# Altium PCB BNC_RJ45_8x.PcbDoc
Units mm, origin at the board's own origin, x right, y up, seen from the top; angles counter-clockwise.
Board outline 110 x 88.1 mm, 2 copper layers (Top Layer, Bottom Layer); 51 components, 42 nets, 140 pads, 9 vias.
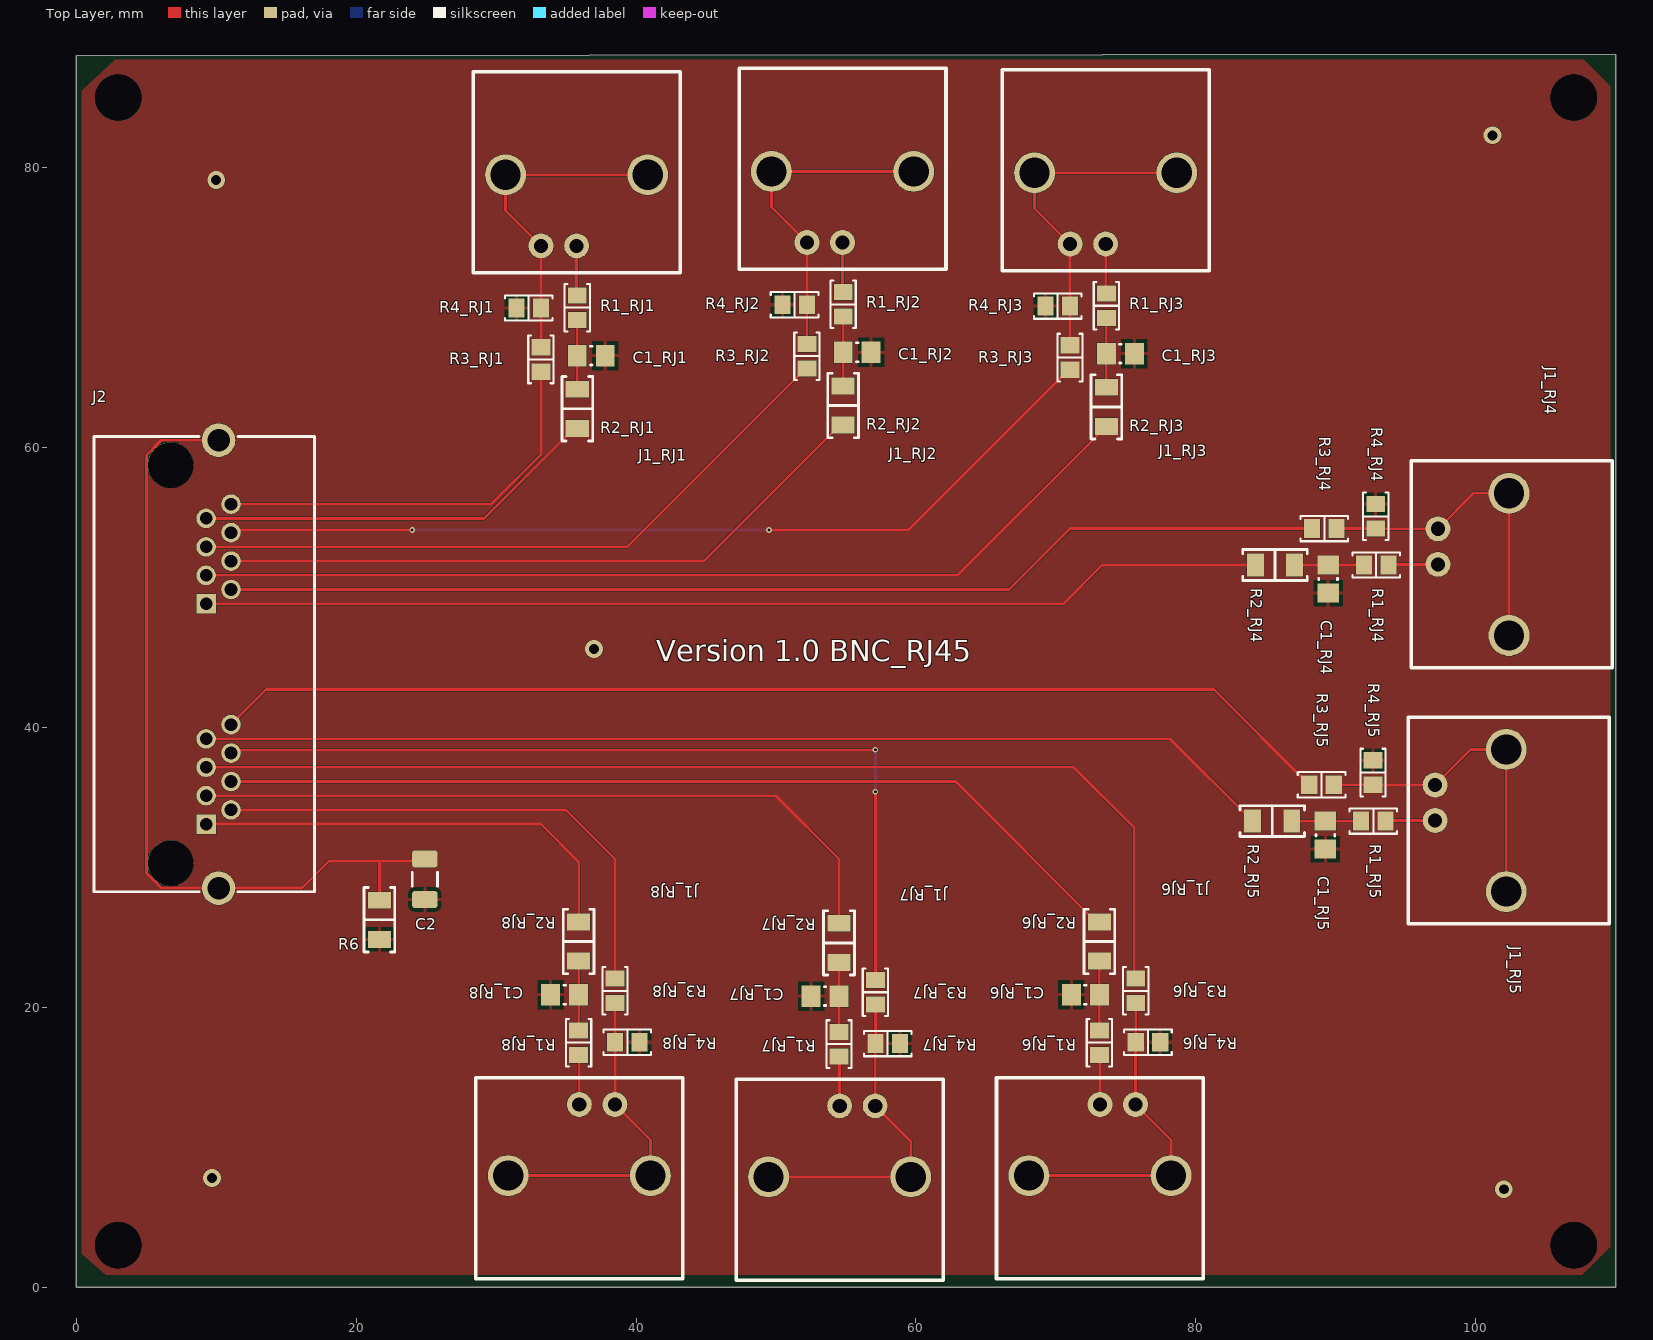
[diagram p0: Top Layer view]
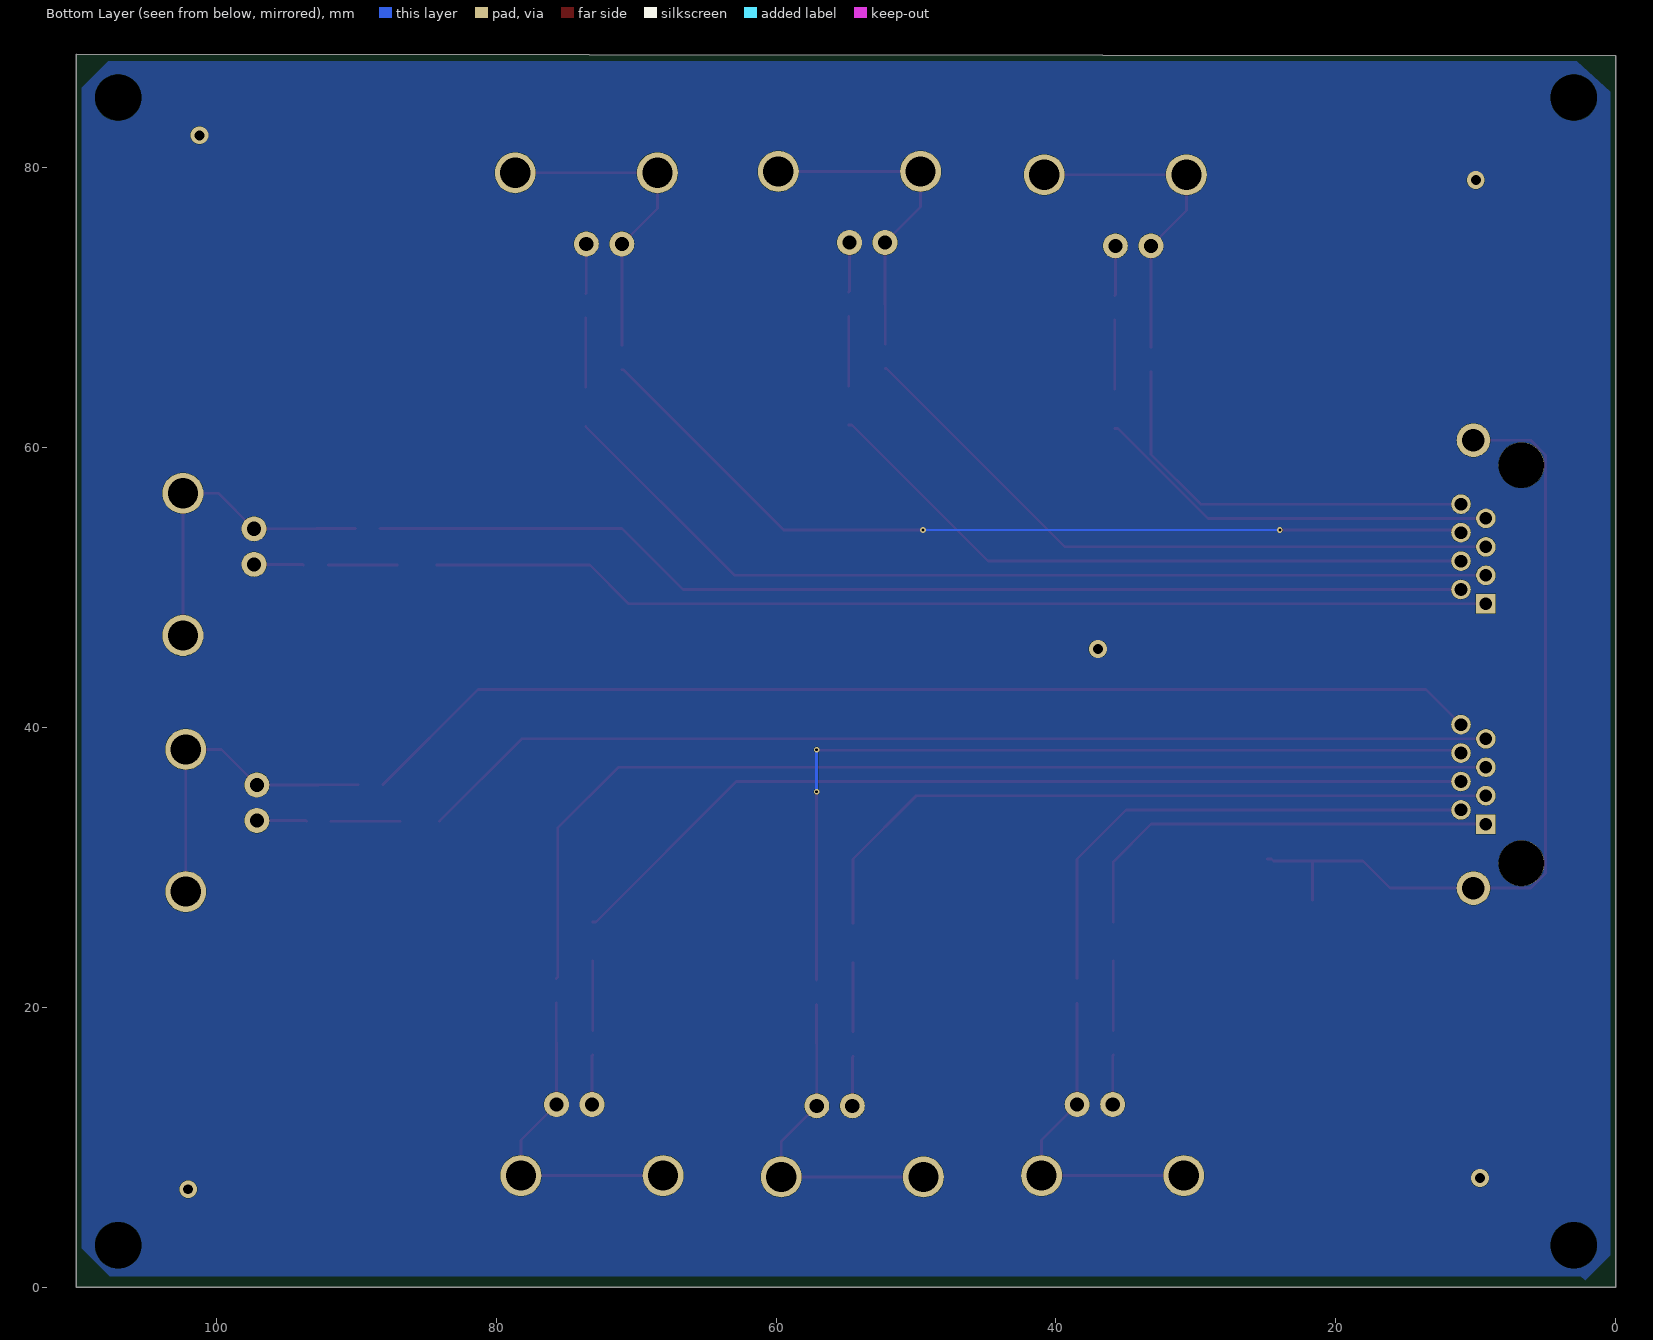
[diagram p1: Bottom Layer view, seen from below]
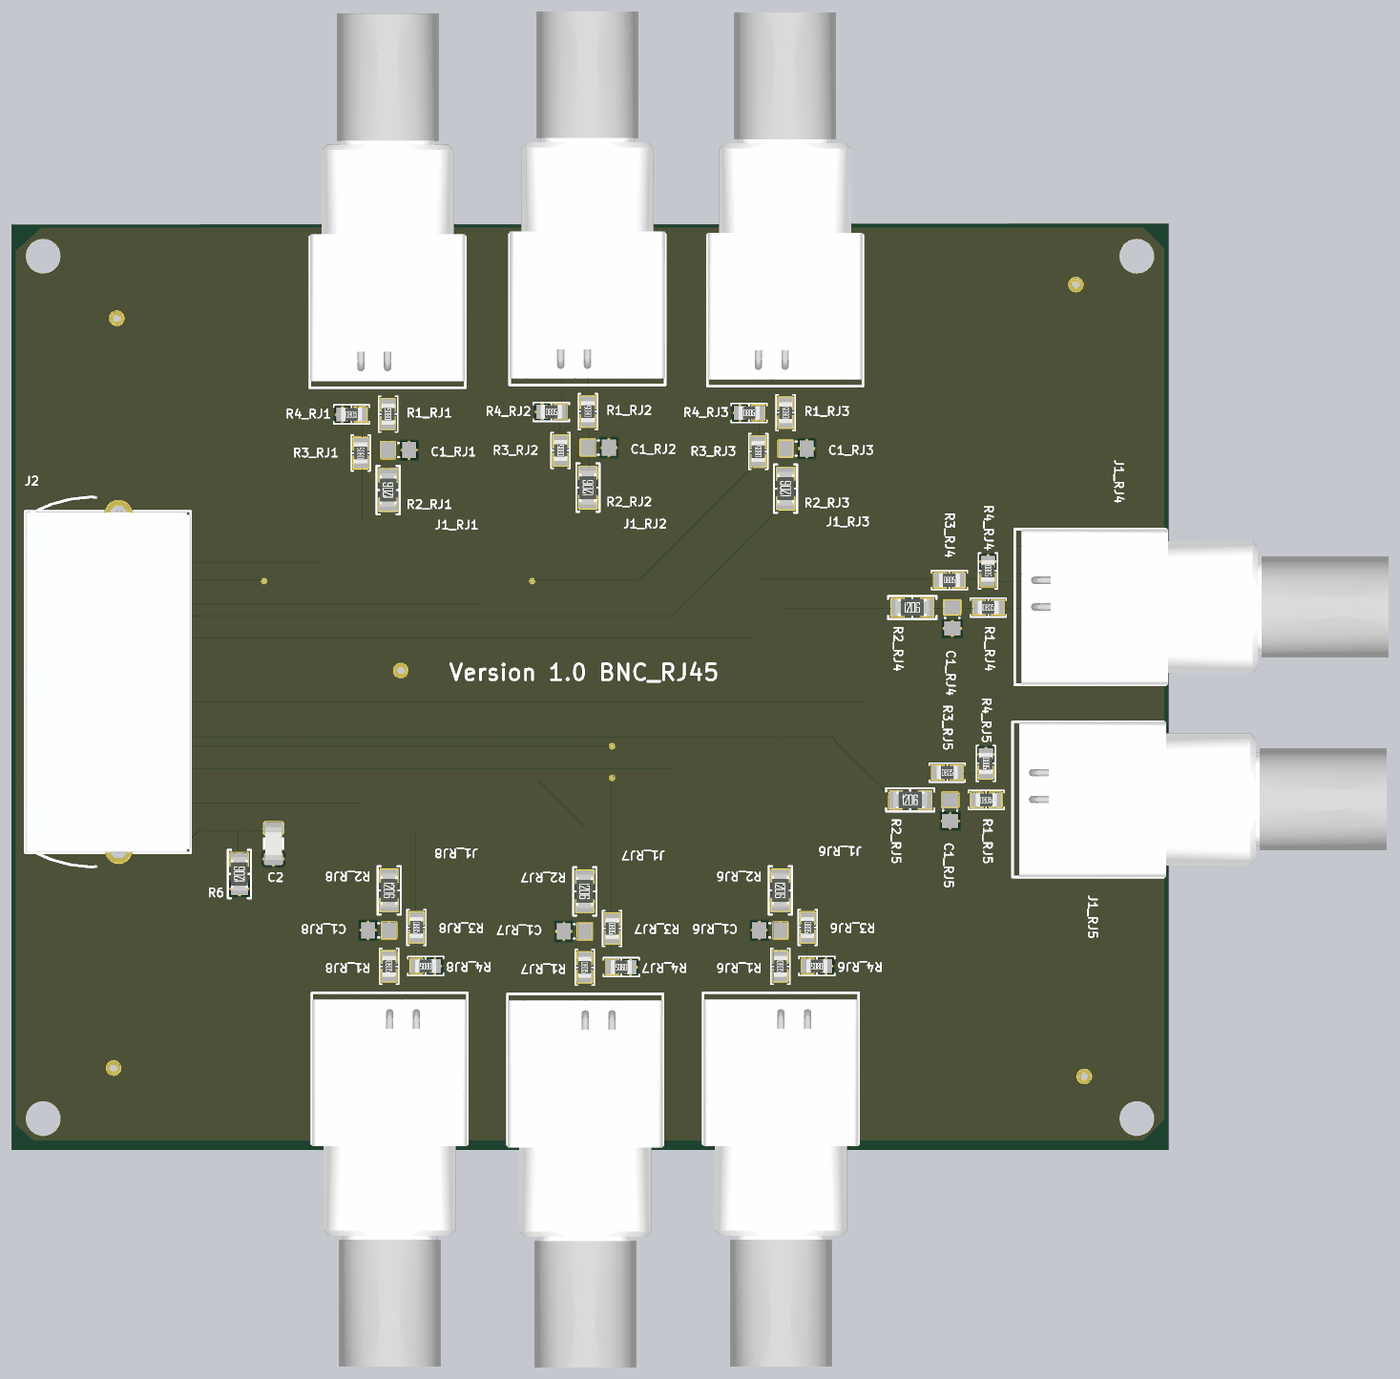
[diagram p2: 3D render of the assembled board from above, using the file's embedded part models]

## Layer stack, top to bottom
Top Solder: solder mask 0.0102, Solder Resist, Dk 3.5
Top Layer: signal copper 0.0356
Dielectric 1: dielectric 0.32, FR-4, Dk 4.8
Bottom Layer: signal copper 0.0356
Bottom Solder: solder mask 0.0102, Solder Resist, Dk 3.5

## Board outline
0,88 0,0 110,0 110,88.097

## Design rules (kind name [scope] priority, off if disabled: settings)
Clearance [All] p1: gap=0.005 ignorepadtopadclearanceinfootprint=FALSE except(0.003: Arc-Arc Arc-Track Track-Track; 0.006: Arc-Via Arc-Text Arc-Hole Track-Via Track-Text Track-Hole SMDPad-Via SMDPad-Text SMDPad-Hole THPad-Via THPad-Text THPad-Hole Via-Via Via-Text Via-Hole Fill-Text Fill-Hole Poly-Text Poly-Hole Region-Text Region-Hole Text-Text Text-Hole)
PolygonConnect [All] p1: connectstyle=Relief reliefconductorwidth=0.254 reliefentries=4 polygonreliefangle="90 Angle" airgapwidth=0.254
RoomDefinition RJ5 [InComponentClass('RJ5')] p1: confinementstyle=ConfineIn formatcopy=TRUE lockcomponents=FALSE outline 82.75,41.9 82.75,25 130.888,25 130.888,41.9
RoomDefinition Top_sheet [InComponentClass('Top_sheet')] p2: confinementstyle=ConfineIn formatcopy=TRUE lockcomponents=FALSE outline 26.302,62.805 0.775,62.805 0.775,23.689 26.302,23.689
RoomDefinition RJ1 [InComponentClass('RJ1')] p3: confinementstyle=ConfineIn formatcopy=TRUE lockcomponents=FALSE outline 27.2,60.062 44.1,60.062 44.1,108.2 27.2,108.2
RoomDefinition RJ3 [InComponentClass('RJ3')] p4: confinementstyle=ConfineIn formatcopy=TRUE lockcomponents=FALSE outline 65,60.2 81.9,60.2 81.9,108.338 65,108.338
RoomDefinition RJ4 [InComponentClass('RJ4')] p5: confinementstyle=ConfineIn formatcopy=TRUE lockcomponents=FALSE outline 82.95,60.2 82.95,43.3 131.088,43.3 131.088,60.2
RoomDefinition RJ2 [InComponentClass('RJ2')] p6: confinementstyle=ConfineIn formatcopy=TRUE lockcomponents=FALSE outline 46.2,60.3 63.1,60.3 63.1,108.438 46.2,108.438
RoomDefinition RJ8 [InComponentClass('RJ8')] p7: confinementstyle=ConfineIn formatcopy=TRUE lockcomponents=FALSE outline 44.5,27.4 27.6,27.4 27.6,-20.738 44.5,-20.738
RoomDefinition RJ7 [InComponentClass('RJ7')] p8: confinementstyle=ConfineIn formatcopy=TRUE lockcomponents=FALSE outline 63.1,27.3 46.2,27.3 46.2,-20.838 63.1,-20.838
RoomDefinition RJ6 [InComponentClass('RJ6')] p9: confinementstyle=ConfineIn formatcopy=TRUE lockcomponents=FALSE outline 81.7,27.4 64.8,27.4 64.8,-20.738 81.7,-20.738
RoutingVias [All] p1: holewidth=0.2 width=0.4 viastyle="Through Hole" minholewidth=0.2 minwidth=0.4 maxholewidth=3.4 maxwidth=3.4
SolderMaskExpansion [All] p1: expansion=0.102 istentingtop=FALSE
Width [All] p1: maxlimit=0.5 minlimit=0.2 preferedwidth=0.254
30 further rules are at their usual default settings.

## Classes and differential pairs
channel class schematic_rj45bnc: RJ1 RJ2 RJ3 RJ4 RJ5 RJ6 RJ7 RJ8
net class Signal_P[1..8]: Signal_P1 Signal_P2 Signal_P3 Signal_P4 Signal_P5 Signal_P6 Signal_P7 Signal_P8
net class Signal_N[1..8]: Signal_N1 Signal_N2 Signal_N3 Signal_N4 Signal_N5 Signal_N6 Signal_N7 Signal_N8
component class Top_sheet: C2 J2 R6
component class RJ8: C1_RJ8 J1_RJ8 R1_RJ8 R2_RJ8 R3_RJ8 R4_RJ8
component class RJ7: C1_RJ7 J1_RJ7 R1_RJ7 R2_RJ7 R3_RJ7 R4_RJ7
component class RJ6: C1_RJ6 J1_RJ6 R1_RJ6 R2_RJ6 R3_RJ6 R4_RJ6
component class RJ5: C1_RJ5 J1_RJ5 R1_RJ5 R2_RJ5 R3_RJ5 R4_RJ5
component class RJ4: C1_RJ4 J1_RJ4 R1_RJ4 R2_RJ4 R3_RJ4 R4_RJ4
component class RJ3: C1_RJ3 J1_RJ3 R1_RJ3 R2_RJ3 R3_RJ3 R4_RJ3
component class RJ2: C1_RJ2 J1_RJ2 R1_RJ2 R2_RJ2 R3_RJ2 R4_RJ2
component class RJ1: C1_RJ1 J1_RJ1 R1_RJ1 R2_RJ1 R3_RJ1 R4_RJ1

## Components (designator, comment, footprint, x,y, rotation, side; value= is the part's Value field where it differs from the comment)
C1_RJ1 "0.01 µF" C_0805 36.8,66.562 r180 top (schematic designator C1)
C1_RJ2 "0.01 µF" C_0805 55.8,66.8 r180 top (schematic designator C1)
C1_RJ3 "0.01 µF" C_0805 74.6,66.7 r180 top (schematic designator C1)
C1_RJ4 "0.01 µF" C_0805 89.45,50.6 r90 top (schematic designator C1)
C1_RJ5 "0.01 µF" C_0805 89.25,32.3 r90 top (schematic designator C1)
C1_RJ6 "0.01 µF" C_0805 72.1,20.9 r0 top (schematic designator C1)
C1_RJ7 "0.01 µF" C_0805 53.5,20.8 r0 top (schematic designator C1)
C1_RJ8 "0.01 µF" C_0805 34.9,20.9 r0 top (schematic designator C1)
C2 "100 pF" C_1206 24.905,29.15 r270 top
J1_RJ1 "1-1478032-0" "Right Angle BNC" 35.754,74.403 r0 top (schematic designator J1)
J1_RJ2 "1-1478032-0" "Right Angle BNC" 54.754,74.641 r0 top (schematic designator J1)
J1_RJ3 "1-1478032-0" "Right Angle BNC" 73.554,74.541 r0 top (schematic designator J1)
J1_RJ4 "1-1478032-0" "Right Angle BNC" 97.291,51.646 r270 top (schematic designator J1)
J1_RJ5 "1-1478032-0" "Right Angle BNC" 97.091,33.346 r270 top (schematic designator J1)
J1_RJ6 "1-1478032-0" "Right Angle BNC" 73.146,13.059 r180 top (schematic designator J1)
J1_RJ7 "1-1478032-0" "Right Angle BNC" 54.546,12.959 r180 top (schematic designator J1)
J1_RJ8 "1-1478032-0" "Right Angle BNC" 35.946,13.059 r180 top (schematic designator J1)
J2 "RJHSE538002" RJHSE-5380-02 6.744,58.741 r270 top
R1_RJ1 "0R" "RES 0805_2012" 35.8,69.987 r90 top (schematic designator R1)
R1_RJ2 "0R" "RES 0805_2012" 54.8,70.225 r90 top (schematic designator R1)
R1_RJ3 "0R" "RES 0805_2012" 73.6,70.125 r90 top (schematic designator R1)
R1_RJ4 "0R" "RES 0805_2012" 92.875,51.6 r0 top (schematic designator R1)
R1_RJ5 "0R" "RES 0805_2012" 92.675,33.3 r0 top (schematic designator R1)
R1_RJ6 "0R" "RES 0805_2012" 73.1,17.475 r270 top (schematic designator R1)
R1_RJ7 "0R" "RES 0805_2012" 54.5,17.375 r270 top (schematic designator R1)
R1_RJ8 "0R" "RES 0805_2012" 35.9,17.475 r270 top (schematic designator R1)
R2_RJ1 "10k" "RES 1206_3216" 35.8,62.762 r90 top (schematic designator R2)
R2_RJ2 "10k" "RES 1206_3216" 54.8,63 r90 top (schematic designator R2)
R2_RJ3 "10k" "RES 1206_3216" 73.6,62.9 r90 top (schematic designator R2)
R2_RJ4 "10k" "RES 1206_3216" 85.65,51.6 r0 top (schematic designator R2)
R2_RJ5 "10k" "RES 1206_3216" 85.45,33.3 r0 top (schematic designator R2)
R2_RJ6 "10k" "RES 1206_3216" 73.1,24.7 r270 top (schematic designator R2)
R2_RJ7 "10k" "RES 1206_3216" 54.5,24.6 r270 top (schematic designator R2)
R2_RJ8 "10k" "RES 1206_3216" 35.9,24.7 r270 top (schematic designator R2)
R3_RJ1 "0R" "RES 0805_2012" 33.2,66.287 r90 top (schematic designator R3)
R3_RJ2 "0R" "RES 0805_2012" 52.2,66.525 r90 top (schematic designator R3)
R3_RJ3 "0R" "RES 0805_2012" 71,66.425 r90 top (schematic designator R3)
R3_RJ4 "0R" "RES 0805_2012" 89.175,54.2 r0 top (schematic designator R3)
R3_RJ5 "0R" "RES 0805_2012" 88.975,35.9 r0 top (schematic designator R3)
R3_RJ6 "0R" "RES 0805_2012" 75.7,21.175 r270 top (schematic designator R3)
R3_RJ7 "0R" "RES 0805_2012" 57.1,21.075 r270 top (schematic designator R3)
R3_RJ8 "0R" "RES 0805_2012" 38.5,21.175 r270 top (schematic designator R3)
R4_RJ1 "0R" "RES 0805_2012" 32.325,69.958 r0 top (schematic designator R4)
R4_RJ2 "0R" "RES 0805_2012" 51.325,70.196 r0 top (schematic designator R4)
R4_RJ3 "0R" "RES 0805_2012" 70.125,70.096 r0 top (schematic designator R4)
R4_RJ4 "0R" "RES 0805_2012" 92.846,55.075 r270 top (schematic designator R4)
R4_RJ5 "0R" "RES 0805_2012" 92.646,36.775 r270 top (schematic designator R4)
R4_RJ6 "0R" "RES 0805_2012" 76.575,17.504 r180 top (schematic designator R4)
R4_RJ7 "0R" "RES 0805_2012" 57.975,17.404 r180 top (schematic designator R4)
R4_RJ8 "0R" "RES 0805_2012" 39.375,17.504 r180 top (schematic designator R4)
R6 "1M" "RES 1206_3216" 21.662,26.254 r90 top

## Footprints (in the part's own frame and the unit in brackets; to place one, negate y for a bottom-side part, rotate by r counter-clockwise, add the part's x,y. Pads: shape width x height; smd on the part's side, far side on the other; paste and mask are expansions set on the pad)
C_0805 [mm] "Chip Capacitor, Body 2.0x1.2mm, Height 1.45mm, IPC Low Density"
  rect 1.35x1.55 smd: 1(-1,0) 2(1,0)
  silkscreen extent -0.05,-0.67 0.05,0.67, body extent -1.1,-0.72 1.1,0.72, height 1.45
C_1206 [mm]
  rrect33% 1.21x1.82 smd: 1(1.45,0) 2(-1.45,0)
  silkscreen extent -0.5,-0.9 0.5,0.9, body extent -1.6,-0.81 1.6,0.81, height 1.82
"RES 0805_2012" [mm] "Chip Resistor, 2-Leads, Body 2.00x1.25mm, IPC Medium Density"
  rect 1.15x1.35 smd: 1(-0.875,0) 2(0.875,0)
  silkscreen extent -1.7,-0.9 1.7,0.9, body extent -1,-0.62 1,0.63, height 0.6
"RES 1206_3216" [mm] "Chip Resistor, 2-Leads, Body 3.13x1.55mm, IPC Medium Density"
  rect 1.2x1.65 smd: 1(-1.4,0) 2(1.4,0)
  silkscreen extent -2.3,-1.1 2.3,1.1, body extent -1.6,-0.8 1.6,0.8, height 0.6
"Right Angle BNC" [mil]
  round 70 hole 40: 1(0,0) 2(-100,0)
  round 115 hole 85: 3(200,200) 4(-200,200)
  silkscreen extent -291,-75 291,490, body extent -290,-50 291,1325, height 519
RJHSE-5380-02 [mm] "Modular Jack Horizontal Shielded Dual Port 8P8C Tab Up"
  rect 1.4x1.4 hole 0.9: A1(9.906,2.54) B1(25.654,2.54)
  round 1.4 hole 0.9: A2(8.89,4.318) A3(7.874,2.54) A4(6.858,4.318) A5(5.842,2.54) A6(4.826,4.318) A7(3.81,2.54) A8(2.794,4.318) B2(24.638,4.318) B3(23.622,2.54) B4(22.606,4.318) B5(21.59,2.54) B6(20.574,4.318) B7(19.558,2.54) B8(18.542,4.318)
  round 3.25 hole 3.25 unplated: MH1(0,0) MH2(28.448,0)
  round 2.4 hole 1.6: S1(-1.778,3.429) S2(30.226,3.429)
  silkscreen extent -2.03,-5.46 30.48,10.29, body extent -3.5,-5.41 31.95,10.29, height 15.06

## Part data
C1_RJ1 C1_RJ2 C1_RJ3 C1_RJ4 C1_RJ5 C1_RJ6 C1_RJ7 C1_RJ8: library part C0805C103K3RACTU, "Capacitor 0805, 25 VDC, 0.01 µF, X7R", Device Package=0805, Manufacturer=KEMET, Operating Temperature="-55 - 125°C", Supplier Part Number 1=80-C0805C103K3R, Tolerance="10 %", Voltage Rating="25 VDC", Component Type="Capacitor 0805", ComponentLink1Description=Datasheet, ComponentLink1URL=https://www.mouser.de/datasheet/2/212/KEM_C1002_X7R_SMD-1102033.pdf, Created from=MGremer, Created On="20.12.2020 13:54:13", Last Updated="17.11.2021 11:24:29", Live Cycle Status=1, Manufacturer Part Number=C0805C103K3RACTU, Mounting Type=SMD, PartID=20, Series="SMD Comm X7R", Stock number="Labor SMD Container", Supplier 1=Mouser, Type=Capacitor
C2: library part 885342008009, "Capacitor 1206, 1 kVDC, 100 pF, C0G", Device Package=1206, Manufacturer="Wuerth Elektronik", Operating Temperature="-55 - 125°C", Supplier Part Number 1=710-885342008009, Tolerance="5 %", Voltage Rating="1 kVDC", Component Type="Capacitor 1206", ComponentLink1Description=Datasheet, ComponentLink1URL=https://www.mouser.de/datasheet/2/445/885342008009-1727900.pdf, Created from=MGremer, Created On="20.12.2020 13:54:13", Last Updated="20.12.2020 17:44:37", Live Cycle Status=1, Manufacturer Part Number=885342008009, Mounting Type=SMD, PartID=62, Series=WCAP-CSMH, Stock number="Labor SMD Container", Supplier 1=Mouser, Type=Capacitor
J1_RJ1 J1_RJ2 J1_RJ3 J1_RJ4 J1_RJ5 J1_RJ6 J1_RJ7 J1_RJ8: "BNC Connector", Alternate Manufacturer=-, Device Package=BNC, Manufacturer=TE, PartNumber="Used in BOM report", Supplier Part Number 1=A97560-ND, Alternate PartNumber=-, Component Type=BNC, ComponentLink1Description=Datasheet, ComponentLink1URL=https://www.te.com/commerce/DocumentDelivery/DDEController?Action=showdoc&DocId=Data+Sheet%7F6-1773448-5_ZDC_RF_COAX_50-75_OHM%7F1007%7Fpdf%7FEnglish%7FENG_DS_6-1773448-5_ZDC_RF_COAX_50-75_OHM_1007.pdf&src-supplier=Avnet, CompType="Used in some BOM reports.  Useful for finding later.", Created from="FSchoenig, MGremer", Created On="12.05.2021 17:41:04", Last Updated="24.08.2021 10:46:04", Live Cycle Status=1, Manufacturer Part Number=1-1478032-0, Mounting Type=THT, MountType="SMT, TH, or N/A", PackageReference="eg:  0603, used in PnP report", PartID=3, RoHS="Used in BOM report.  Use Y or N.", Stock number="not stored", Supplier 1=Digi-Key, SymbolCreator="Use LDAP id", SymbolVersion="use current date i.e. 2008-05-20", Type=BNC, U/M="EA, IN, or GM"
J2: "CAT5, RJ45 Connector, 1x2", Device Package=RJ45, Manufacturer=Amphenol, Supplier Part Number 1=1860605, Component Type="RJ45 Connector", ComponentLink1Description=Datasheet, ComponentLink1URL=https://www.farnell.com/cad/2360382.pdf, Created from=MGremer, Created On="22.02.2021 16:43:38", Last Updated="22.02.2021 16:43:38", Live Cycle Status=1, Manufacturer Part Number=RJHSE538002, Mounting Type=THT, PartID=4, Series=RJHSE, Stock number="not stored", Supplier 1=Farnell, Type="RJ45 Connector"
R1_RJ1 R1_RJ2 R1_RJ3 R1_RJ4 R1_RJ5 R1_RJ6 R1_RJ7 R1_RJ8 R3_RJ1 R3_RJ2 R3_RJ3 R3_RJ4 R3_RJ5 R3_RJ6 R3_RJ7 R3_RJ8 R4_RJ1 R4_RJ2 R4_RJ3 R4_RJ4 R4_RJ5 R4_RJ6 R4_RJ7 R4_RJ8: library part RC0805JR-100RL, "SMD resistor 5%", Device Package=0805, Manufacturer=Yageo, Supplier Part Number 1=603-RC0805JR-100RL, Tolerance=5%, Component Type="SMD resistor", ComponentLink1Description=Datasheet, ComponentLink1URL=https://www.mouser.com/catalog/specsheets/Yageo-03-18-2021-PYu-RC_Group_51_RoHS_L_11.pdf, Created from=MGremer, Created On="14.12.2020 16:17:14", Last Updated="14.12.2020 18:22:52", Live Cycle Status=1, Manufacturer Part Number=RC0805JR-100RL, Mounting Type=SMD, PartID=186, Stock number="not stored", Supplier 1=Mouser, Type=Resistor
R2_RJ1 R2_RJ2 R2_RJ3 R2_RJ4 R2_RJ5 R2_RJ6 R2_RJ7 R2_RJ8: library part ERJ-8ENF1002V, "SMD resistor 1%", Device Package=1206, Manufacturer=Panasonic, Supplier Part Number 1=667-ERJ-8ENF1002V, Tolerance="1 %", Component Type="SMD resistor", ComponentLink1Description=Datasheet, ComponentLink1URL=https://www.mouser.de/datasheet/2/315/AOA0000C304-1149620.pdf, Created from=MGremer, Created On="14.12.2020 16:17:14", Last Updated="24.01.2021 12:18:37", Live Cycle Status=1, Manufacturer Part Number=ERJ-8ENF1002V, Mounting Type=SMD, PartID=201, Stock number="not stored", Supplier 1=Mouser, Type=Resistor
R6: library part KTR18EZPF1004, "SMD resistor 0.1%", Device Package=1206, Manufacturer=ROHM, Supplier Part Number 1=2802466, Tolerance="1 %", Component Type="SMD resistor", ComponentLink1Description=Datasheet, ComponentLink1URL=http://www.farnell.com/datasheets/3171135.pdf, Created from=MGremer, Created On="14.12.2020 16:17:14", Last Updated="24.01.2021 12:18:37", Live Cycle Status=1, Manufacturer Part Number=KTR18EZPF1004, Mounting Type=SMD, PartID=175, Stock number="not stored", Supplier 1=Farnell, Type=Resistor

## Free pads (board coordinates)
  round 1.524 hole 3.3: 2(3,3) 2(3,85) 2(107,3) 2(107,85)

## Via types
v1: diameter 1.27, hole 0.711, Top Layer to Bottom Layer, 5 vias
v2: diameter 0.4, hole 0.2, Top Layer to Bottom Layer, 4 vias

## Nets (pads, with @x,y where several pads share a name; then routed paths per layer and width w, separated by ;. In a path a pad name is that pad's centre, name@x,y a point inside that pad or via, vN(x,y) a via of type N, cw(c..) or ccw(c..) an arc to the next point about the centre after c; other vN are vias at no path point)
GND: C1_RJ1.1 C1_RJ2.1 C1_RJ3.1 C1_RJ4.1 C1_RJ5.1 C1_RJ6.1 C1_RJ7.1 C1_RJ8.1 C2.1 R4_RJ1.1 R4_RJ2.1 R4_RJ3.1 R4_RJ4.1 R4_RJ5.1 R4_RJ6.1 R4_RJ7.1 R4_RJ8.1 R6.1
NetC1_RJ1_2: C1_RJ1.2 R1_RJ1.1 R2_RJ1.2 | length 5
  Top Layer w0.2: R2_RJ1.2 C1_RJ1.2 R1_RJ1.1
NetC1_RJ2_2: C1_RJ2.2 R1_RJ2.1 R2_RJ2.2 | length 5
  Top Layer w0.2: R2_RJ2.2 C1_RJ2.2 R1_RJ2.1
NetC1_RJ3_2: C1_RJ3.2 R1_RJ3.1 R2_RJ3.2 | length 5
  Top Layer w0.2: R2_RJ3.2 C1_RJ3.2 R1_RJ3.1
NetC1_RJ4_2: C1_RJ4.2 R1_RJ4.1 R2_RJ4.2 | length 5
  Top Layer w0.2: R2_RJ4.2 C1_RJ4.2 R1_RJ4.1
NetC1_RJ5_2: C1_RJ5.2 R1_RJ5.1 R2_RJ5.2 | length 5
  Top Layer w0.2: R2_RJ5.2 C1_RJ5.2 R1_RJ5.1
NetC1_RJ6_2: C1_RJ6.2 R1_RJ6.1 R2_RJ6.2 | length 5
  Top Layer w0.2: R1_RJ6.1 C1_RJ6.2 R2_RJ6.2
NetC1_RJ7_2: C1_RJ7.2 R1_RJ7.1 R2_RJ7.2 | length 5
  Top Layer w0.2: R1_RJ7.1 C1_RJ7.2 R2_RJ7.2
NetC1_RJ8_2: C1_RJ8.2 R1_RJ8.1 R2_RJ8.2 | length 5
  Top Layer w0.2: R1_RJ8.1 C1_RJ8.2 R2_RJ8.2
NetC2_2: C2.2 J2.S1 J2.S2 R6.2 | length 59.5
  Top Layer w0.2: J2.S1 6.073,60.519 5.013,59.458 5.013,29.576 6.073,28.515 J2.S2 16.123,28.515 18.062,30.454 21.762,30.454 ; R6.2 21.662,30.354 21.762,30.454 ; C2.2 24.6,30.6 24.454,30.454 21.762,30.454
NetJ1_RJ1_1: J1_RJ1.1 R1_RJ1.2 | length 3.6
  Top Layer w0.2: J1_RJ1.1 35.754,70.908 R1_RJ1.2
NetJ1_RJ1_2: J1_RJ1.2 J1_RJ1.3 J1_RJ1.4 R3_RJ1.2 R4_RJ1.2 | length 23.5
  Top Layer w0.2: R3_RJ1.2 R4_RJ1.2 33.214,69.972 J1_RJ1.2 30.674,76.943 J1_RJ1.4 J1_RJ1.3
NetJ1_RJ2_1: J1_RJ2.1 R1_RJ2.2 | length 3.6
  Top Layer w0.2: J1_RJ2.1 54.754,71.146 R1_RJ2.2
NetJ1_RJ2_2: J1_RJ2.2 J1_RJ2.3 J1_RJ2.4 R3_RJ2.2 R4_RJ2.2 | length 23.5
  Top Layer w0.2: R3_RJ2.2 R4_RJ2.2 52.214,70.21 J1_RJ2.2 49.674,77.181 J1_RJ2.4 J1_RJ2.3
NetJ1_RJ3_1: J1_RJ3.1 R1_RJ3.2 | length 3.6
  Top Layer w0.2: J1_RJ3.1 73.554,71.046 R1_RJ3.2
NetJ1_RJ3_2: J1_RJ3.2 J1_RJ3.3 J1_RJ3.4 R3_RJ3.2 R4_RJ3.2 | length 23.5
  Top Layer w0.2: R3_RJ3.2 R4_RJ3.2 71.014,70.11 J1_RJ3.2 68.474,77.081 J1_RJ3.4 J1_RJ3.3
NetJ1_RJ4_1: J1_RJ4.1 R1_RJ4.2 | length 3.6
  Top Layer w0.2: R1_RJ4.2 93.796,51.646 J1_RJ4.1
NetJ1_RJ4_2: J1_RJ4.2 J1_RJ4.3 J1_RJ4.4 R3_RJ4.2 R4_RJ4.2 | length 23.5
  Top Layer w0.2: R3_RJ4.2 R4_RJ4.2 92.86,54.186 J1_RJ4.2 99.831,56.726 J1_RJ4.4 J1_RJ4.3
NetJ1_RJ5_1: J1_RJ5.1 R1_RJ5.2 | length 3.6
  Top Layer w0.2: R1_RJ5.2 93.596,33.346 J1_RJ5.1
NetJ1_RJ5_2: J1_RJ5.2 J1_RJ5.3 J1_RJ5.4 R3_RJ5.2 R4_RJ5.2 | length 23.5
  Top Layer w0.2: R3_RJ5.2 R4_RJ5.2 92.66,35.886 J1_RJ5.2 99.631,38.426 J1_RJ5.4 J1_RJ5.3
NetJ1_RJ6_1: J1_RJ6.1 R1_RJ6.2 | length 3.6
  Top Layer w0.2: R1_RJ6.2 73.146,16.554 J1_RJ6.1
NetJ1_RJ6_2: J1_RJ6.2 J1_RJ6.3 J1_RJ6.4 R3_RJ6.2 R4_RJ6.2 | length 23.5
  Top Layer w0.2: J1_RJ6.3 J1_RJ6.4 78.226,10.519 J1_RJ6.2 75.686,17.49 R4_RJ6.2 R3_RJ6.2
NetJ1_RJ7_1: J1_RJ7.1 R1_RJ7.2 | length 3.6
  Top Layer w0.2: R1_RJ7.2 54.546,16.454 J1_RJ7.1
NetJ1_RJ7_2: J1_RJ7.2 J1_RJ7.3 J1_RJ7.4 R3_RJ7.2 R4_RJ7.2 | length 23.5
  Top Layer w0.2: J1_RJ7.3 J1_RJ7.4 59.626,10.419 J1_RJ7.2 57.086,17.39 R4_RJ7.2 R3_RJ7.2
NetJ1_RJ8_1: J1_RJ8.1 R1_RJ8.2 | length 3.6
  Top Layer w0.2: R1_RJ8.2 35.946,16.554 J1_RJ8.1
NetJ1_RJ8_2: J1_RJ8.2 J1_RJ8.3 J1_RJ8.4 R3_RJ8.2 R4_RJ8.2 | length 23.5
  Top Layer w0.2: J1_RJ8.3 J1_RJ8.4 41.026,10.519 J1_RJ8.2 38.486,17.49 R4_RJ8.2 R3_RJ8.2
Signal_N1: J2.A8 R3_RJ1.1 | length 29.5
  Top Layer w0.2: J2.A8 29.647,55.947 33.2,59.5 R3_RJ1.1
Signal_N2: J2.A5 R3_RJ2.1 | length 48.2
  Top Layer w0.2: J2.A5 39.349,52.899 52.1,65.65 R3_RJ2.1
Signal_N3: J2.A6 R3_RJ3.1 | length 64.8
  Top Layer w0.2: J2.A6 11.247,54.1 v2(24,54.1) ; v2(49.5,54.1) 59.45,54.1 70.9,65.55 R3_RJ3.1
  Bottom Layer w0.2: v2(24,54.1) v2(49.5,54.1)
Signal_N4: J2.A2 R3_RJ4.1 | length 79
  Top Layer w0.2: J2.A2 66.651,49.851 71,54.2 R3_RJ4.1
Signal_N5: J2.B8 R3_RJ5.1 | length 80.9
  Top Layer w0.2: J2.B8 13.563,42.7 81.3,42.7 R3_RJ5.1
Signal_N6: J2.B5 R3_RJ6.1 | length 78.9
  Top Layer w0.2: J2.B5 71.249,37.151 75.6,32.8 75.6,22.15 R3_RJ6.1
Signal_N7: J2.B6 R3_RJ7.1 | length 62.6
  Top Layer w0.2: J2.B6 11.257,38.362 57.062,38.362 v2(57.1,38.4) ; R3_RJ7.1 v2(57.1,35.4)
  Bottom Layer w0.2: v2(57.1,35.4) v2(57.1,38.4)
Signal_N8: J2.B2 R3_RJ8.1 | length 37.4
  Top Layer w0.2: J2.B2 34.997,34.103 38.5,30.6 R3_RJ8.1
Signal_P1: J2.A7 R2_RJ1.1 | length 29.2
  Top Layer w0.2: J2.A7 29.144,54.931 35.575,61.362 R2_RJ1.1
Signal_P2: J2.A4 R2_RJ2.1 | length 47.8
  Top Layer w0.2: J2.A4 44.858,51.883 54.575,61.6 R2_RJ2.1
Signal_P3: J2.A3 R2_RJ3.1 | length 68.7
  Top Layer w0.2: J2.A3 62.967,50.867 R2_RJ3.1
Signal_P4: J2.A1 R2_RJ4.1 | length 76.1
  Top Layer w0.2: J2.A1 70.535,48.835 73.3,51.6 R2_RJ4.1
Signal_P5: J2.B7 R2_RJ5.1 | length 77.2
  Top Layer w0.2: J2.B7 78.167,39.183 R2_RJ5.1
Signal_P6: J2.B4 R2_RJ6.1 | length 66.2
  Top Layer w0.2: J2.B4 62.84,36.135 72.875,26.1 R2_RJ6.1
Signal_P7: J2.B3 R2_RJ7.1 | length 51.7
  Top Layer w0.2: J2.B3 49.981,35.119 54.5,30.6 R2_RJ7.1
Signal_P8: J2.B1 R2_RJ8.1 | length 32
  Top Layer w0.2: J2.B1 33.213,33.087 35.9,30.4 R2_RJ8.1
pads on no net: J2.MH1 J2.MH2
copper on no net:
  other v1: 102,7 9.7,7.8 37,45.6 10,79.1 101.2,82.3

## Polygon pours and split planes (outlines as drawn)
GND on Bottom Layer "GND_BOT" (solid, pour order 3): 0.4,85.4 0.4,2.3 2.2,0.5 2.5,0.8 107.6,0.8 109.6,2.8 109.6,85.7 107.7,87.6 2.8,87.6
GND on Top Layer "GND_TOP" (solid, pour order 4): 0.4,85.5 0.4,2.4 2.1,0.9 2.5,0.9 107.6,0.9 109.6,2.9 109.6,85.8 107.7,87.7 2.8,87.7

## Silkscreen, mask and mechanical layers (free items; w line width, h text height)
Top Overlay:
  text "Version 1.0 BNC_RJ45" at 41.454,44.708 h1.52
Board:
  lines w0.254: 0,88 0,0 109.9,0 109.9,88 0.1,88

## Dimensions
109.9,0 to 109.9,88 on Dimensions
0,88 to 109.9,88 on Dimensions